# Altium PCB load_cell_amp.PcbDoc
Units mil, origin at the board's own origin, x right, y up, seen from the top; angles counter-clockwise.
Board outline 6000 x 4000 mil, 2 copper layers (Top Layer, Bottom Layer); 13 components, 9 nets, 42 pads, 4 vias.
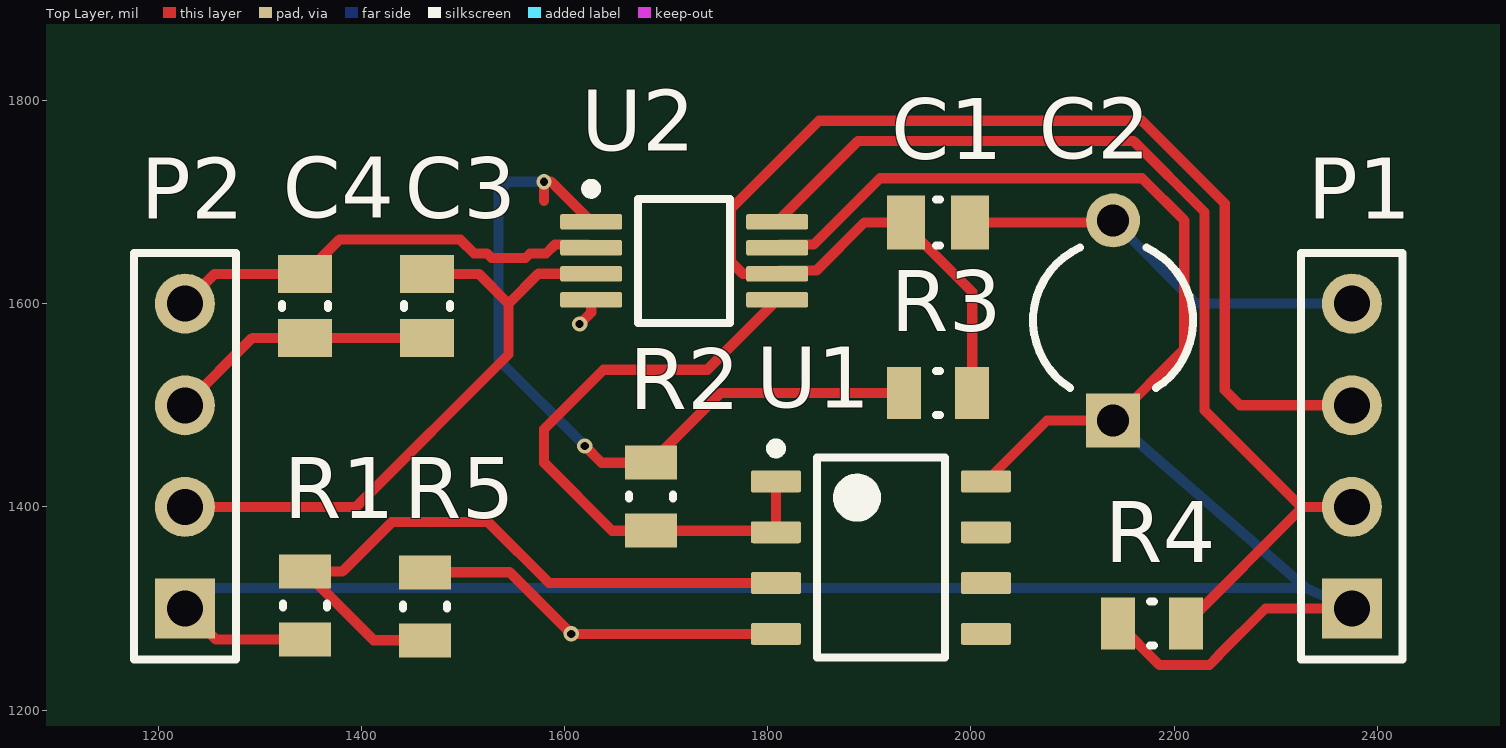
[diagram p0: Top Layer view]
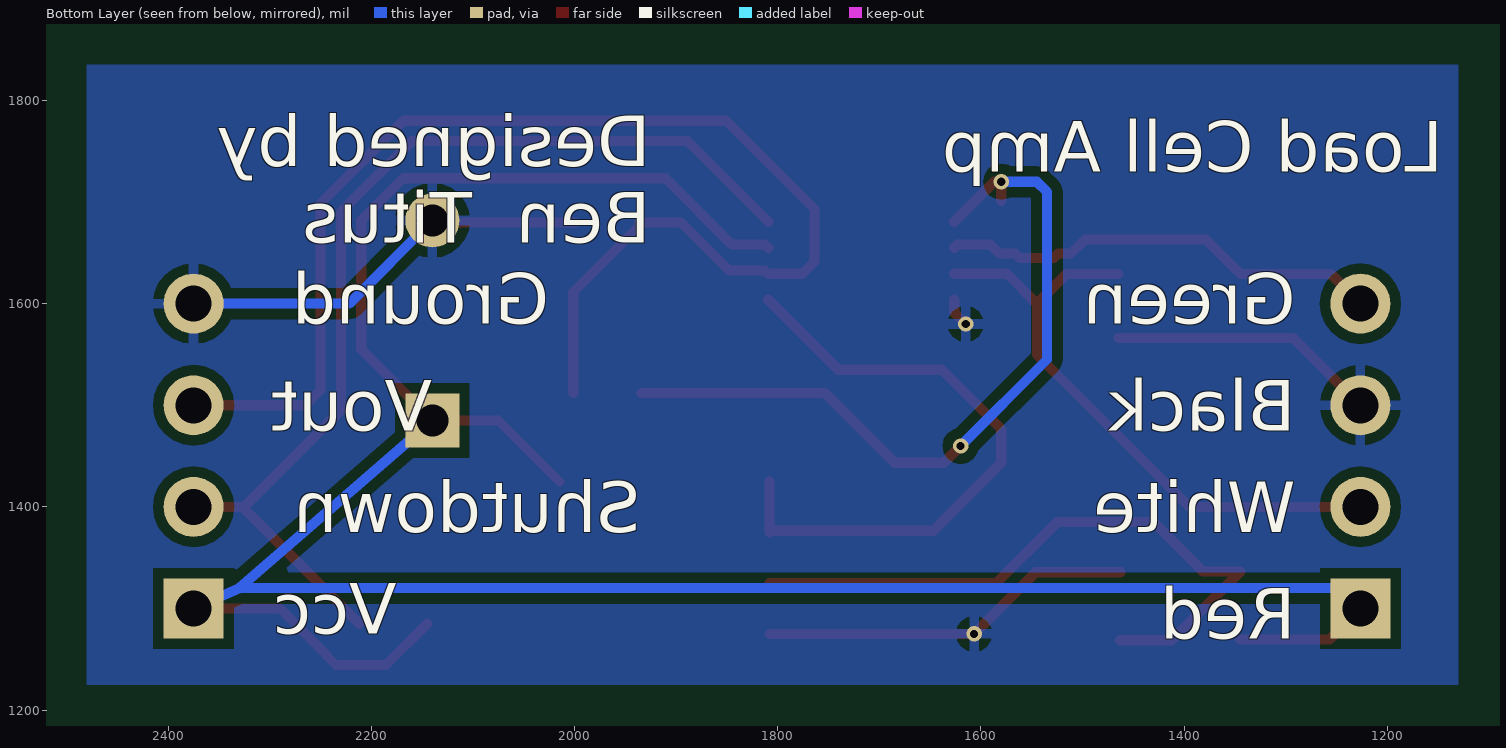
[diagram p1: Bottom Layer view, seen from below]

## Layer stack, top to bottom
Top Solder: solder mask 0.4, Solder Resist, Dk 3.5
Top Layer: signal copper 1.4
Dielectric 1: dielectric 12.6, FR-4, Dk 4.8
Bottom Layer: signal copper 1.4
Bottom Solder: solder mask 0.4, Solder Resist, Dk 3.5

## Board outline
1000,1000 7000,1000 7000,5000 1000,5000

## Design rules (kind name [scope] priority, off if disabled: settings)
Clearance [All] p1: gap=10 ignorepadtopadclearanceinfootprint=FALSE except(0: Arc-Hole Track-Hole SMDPad-Hole THPad-Hole Via-Hole Fill-Hole Poly-Hole Region-Hole Text-Hole)
PolygonConnect [All] p1: connectstyle=Relief reliefconductorwidth=10 reliefentries=4 polygonreliefangle="90 Angle" airgapwidth=10
RoomDefinition load_cell_amp [InComponentClass('load_cell_amp')] p1: confinementstyle=ConfineIn formatcopy=TRUE lockcomponents=FALSE outline 1130,1230 2485,1230 2485,1835 1130,1835
RoutingVias [All] p1: holewidth=28 width=50 viastyle="Through Hole" minholewidth=8 minwidth=15 maxholewidth=28 maxwidth=50
SolderMaskExpansion [All] p1: expansion=4
Width [All] p1: maxlimit=10 minlimit=10 preferedwidth=10
30 further rules are at their usual default settings.

## Components (designator, comment, footprint, x,y, rotation, side; value= is the part's Value field where it differs from the comment)
C1 "10nF" CAPC0805(2012)145_L 1967.87,1680 r180 top
C2 "1uF" CAPR5-4X5 2140,1583.48 r90 top
C3 "10nF" CAPC0805(2012)145_L 1464.84,1597.83 r90 top
C4 "10nF" CAPC0805(2012)145_L 1344.84,1597.83 r90 top
P1 "Header 4" HDR1X4 2375,1300 r90 top
P2 "Load Cell" HDR1X4 1226.54,1300 r90 top
R1 "5.0k" RESC0805(2012)_L 1344.84,1302.76 r270 top
R2 "1k" RESC0805(2012)_L 1685,1410 r90 top
R3 "200k" RESC0805(2012)_L 1967.87,1512.2 r0 top
R4 "10k" RESC0805(2012)_L 2178.46,1285 r0 top
R5 "3.9k" RESC0805(2012)_L 1462.87,1302.17 r270 top
U1 "LM358DR" D0008A_L 1911.54,1350 r0 top
U2 "INA332AIDGKR" DGK0008A_M 1717.87,1642.2 r0 top

## Footprints (in the part's own frame and the unit in brackets; to place one, negate y for a bottom-side part, rotate by r counter-clockwise, add the part's x,y. Pads: shape width x height; smd on the part's side, far side on the other; paste and mask are expansions set on the pad)
CAPC0805(2012)145_L [mm]
  rect 0.95x1.35 smd: 1(-0.8,0) 2(0.8,0)
  silkscreen extent -0.05,-0.58 0.05,0.58, body extent -1.1,-0.72 1.1,0.72, height 1.45
CAPR5-4X5 [mm] "Capacitor; 2 Leads"
  rect 1.35x1.35 hole 0.8: 1(-2.5,0)
  round 1.35 hole 0.8: 2(2.5,0)
  silkscreen extent -1.69,-2 1.82,2
D0008A_L [mm] "SOIC, 8-Leads, Body 5x4mm, Pitch 1.27mm, IPC High Density"
  rrect18% 1.25x0.55 smd: 1(-2.625,1.905) 2(-2.625,0.635) 3(-2.625,-0.635) 4(-2.625,-1.905) 5(2.625,-1.905) 6(2.625,-0.635) 7(2.625,0.635) 8(2.625,1.905)
  silkscreen extent -2.75,-2.5 1.6,2.85, body extent -3,-2.45 3,2.45, height 1.63
DGK0008A_M [mm] "TSOP, 8-Leads, Body 3.1x3.1mm, Pitch 0.65mm, IPC Low Density"
  rrect22% 1.55x0.381 smd: 1(-2.325,0.975) 2(-2.325,0.325) 3(-2.325,-0.325) 4(-2.325,-0.975) 5(2.325,-0.975) 6(2.325,-0.325) 7(2.325,0.325) 8(2.325,0.975)
  silkscreen extent -2.45,-1.55 1.15,1.92, body extent -2.45,-1.5 2.45,1.5, height 0.94
HDR1X4 [mm] "Connector; Header; 4 Position"
  rect 1.5x1.5 hole 0.9: 1(0,0)
  round 1.5 hole 0.9: 2(2.54,0) 3(5.08,0) 4(7.62,0)
  silkscreen extent -1.27,-1.27 8.89,1.27
RESC0805(2012)_L [mm]
  rect 0.85x1.3 smd: 1(-0.85,0) 2(0.85,0)
  silkscreen extent -0.05,-0.55 0.05,0.55, body extent -1.1,-0.67 1.1,0.68, height 0.7

## Part data
C1 C3 C4: library part CMP-1590-00003-1, "0805 (2012 Metric) Chip Capacitor", Case-EIA=0805, Case-Metric=2012, PackageReference=CAPC0805(2012)145
C2: library part Cap2, "Capacitor", PackageDescription="Capacitor; 2 Leads", PackageReference=CAPR5-4X5, Published=23-Sep-2002, Publisher="Altium Limited"
P1: "Header, 4-Pin", LatestRevisionDate=17-Jul-2002, LatestRevisionNote="Re-released for DXP Platform.", Publisher="Altium Limited"
P2: library part "Header 4", "Header, 4-Pin", LatestRevisionDate=17-Jul-2002, LatestRevisionNote="Re-released for DXP Platform.", Publisher="Altium Limited"
R1 R2 R3 R4 R5: library part CMP-1591-00002-1, "0805 (2012 Metric) Chip Resistor", Case-EIA=0805, Case-Metric=2012, PackageReference=RESC0805(2012)
U1: library part CMP-1685-00009-1, "Dual Operational Amplifier, 3 to 32 V, 0 to 70 degC, 8-Pin SOIC (D), Green (RoHS & no Sb/Br), Tape and Reel", Code_JEDEC=MS-012, ComponentLink1Description="Manufacturer URL", ComponentLink1URL=http://www.ti.com/, ComponentLink2Description=Datasheet, ComponentLink2URL=http://www.ti.com/lit/ds/symlink/lm358.pdf, ComponentLink3Description="Package Specification", ComponentLink3URL=http://www.ti.com/lit/ml/msoi002j/msoi002j.pdf, DatasheetVersion="SLOS068T, 04/2015", PackageDescription="8-Pin Small Outline Integrated Circuit, Body 4.9 x 3.9 mm, Pitch 1.27 mm", PackageReference=D0008A, PackageVersion="4040047-3/M, 06/2011"
U2: library part CMP-0944-00077-2, "Low-Power, Single Supply, CMOS, Low Cost, Instrumentation Amplifier, -55 to 125 degC, 8-pin SOP (DGK8), Green (RoHS & no Sb/Br)", Input Bias Current (+/-)(Max)(nA)=0.01, Manufacturer="Texas Instruments", Quiescent Current (+/-)(Typ)(mA)=0.415, CMRR(Min)(dB)=60, Code_JEDEC=MO-187, ComponentLink1Description="Manufacturer URL", ComponentLink1URL=http://www.ti.com/, ComponentLink2Description=Datasheet, ComponentLink2URL=http://www.ti.com/general/docs/lit/getliterature.tsp?genericPartNumber=INA332&fileType=pdf, ComponentLink3Description="Package Specification", ComponentLink3URL=http://www.ti.com/litv/pdf/mpds028d, DatasheetVersion=SBOS216B, Eco-Plan="Green (RoHS & no Sb/Br)", Gain(V/V)="5 to 1000", Input Offset (+/-)(Max)(uV)=8000, Mounting Technology="Surface Mount", Noise at 1kHz(Typ)(nV/rt(Hz))=46, Non-Linearity (+/-)(Max)(%)=0.01, Number of Channels=1, PackageDescription="8-Pin Thin Small Outline, Body 3 x 3 mm, Pitch 0.65 mm", PackageReference=DGK0008A, PackageVersion="4073329/E, 05/2006", PartNumber=INA332AIDGKR, SubFamily="Single Supply", Vs(Max)(V)=5.5, Vs(Min)(V)=2.5

## Via types
v1: diameter 15, hole 8, Top Layer to Bottom Layer, 4 vias

## Nets (pads, with @x,y where several pads share a name; then routed paths per layer and width w, separated by ;. In a path a pad name is that pad's centre, name@x,y a point inside that pad or via, vN(x,y) a via of type N, cw(c..) or ccw(c..) an arc to the next point about the centre after c; other vN are vias at no path point)
GND: C1.1 C2.2 C3.1 C4.1 P1.4 P2.3 R5.1 U1.4 U2.4 | length 1075.1
  Top Layer w10: P2.3 1292.87,1566.34 C4.1 C3.1 ; R5.1 1546.09,1335.63 v1(1606.72,1275) U1.4 ; v1(1615,1580) 1626.34,1591.34 U2.4 ; C1.1 2138.09,1680 C2.2
  Bottom Layer w10: C2.2 2221.91,1600 P1.4
NetC1_2: C1.2 P1.3 R3.2 U2.6 | length 1315.7
  Top Layer w10: R3.2 2001.34,1611.54 1936.38,1676.5 C1.2 1895.36,1680 1847.86,1632.5 1812.5,1632.5 U2.6 1775.64,1629.41 1763.9,1641.15 1763.9,1693.34 1850.56,1780 2168.53,1780 2250,1698.53 2250,1515 2265,1500 P1.3
NetC3_2: C3.2 P2.2 U2.3 | length 616.4
  Top Layer w10: P2.2 1395,1400 1545,1550 1545,1600 ; C3.2 1515.67,1629.33 1545,1600 ; U2.3 1574.41,1629.41 1545,1600
NetC4_2: C4.2 P2.4 U2.2 | length 440.1
  Top Layer w10: P2.4 1255.87,1629.33 C4.2 1378.54,1663.03 1497.63,1663.03 1511.33,1649.33 1523.95,1649.33 1528.28,1645 1561.72,1645 1566.13,1649.41 1581.9,1649.41 1590.58,1658.09 1623.25,1658.09 U2.2
NetP1_2: P1.2 R4.2 U2.8 | length 1024.6
  Top Layer w10: U2.8 1888.82,1760 2160.24,1760 2230,1690.24 2230,1495 2325,1400 2326.93,1400 ; R4.2 2326.93,1400 ; P1.2 2326.93,1400
NetR1_1: R1.1 R5.2 U1.3 | length 654.4
  Top Layer w10: R5.2 1412.36,1268.7 R1.1 1381.22,1336.22 1430,1385 1525,1385 1585,1325 U1.3
NetR2_1: R2.1 U1.1 U1.2 U2.5 | length 621.8
  Top Layer w10: U1.1 U1.2 1806.65,1376.54 R2.1 1646.9,1376.54 1580,1443.43 1580,1476.57 1638.43,1535 1740.59,1535 U2.5
NetR2_2: R2.2 R3.1 U2.1 | length 765.6
  Top Layer w10: 1580,1701.18 v1(1580,1720) 1586.93,1720 U2.1 ; v1(1620,1460) 1636.54,1443.46 R2.2 1753.74,1512.2 R3.1
  Bottom Layer w10: v1(1580,1720) 1545,1720 1535,1710 1535,1545 v1(1620,1460)
VCC: C2.1 P1.1 P2.1 R1.2 R4.1 U1.8 U2.7 | length 2622.6
  Top Layer w10: P2.1 1257.24,1269.29 R1.2 ; U2.7 1812.5,1658.09 1845.17,1658.09 1910.56,1723.48 2168.48,1723.48 2210,1681.96 2210,1555.06 C2.1 2074.94,1485.06 U1.8 ; R4.1 2185.59,1244.41 2234.87,1244.41 2243.66,1253.2 2243.66,1253.66 2290,1300 P1.1
  Bottom Layer w10: P2.1@1231.54,1320 2330.05,1320 ; C2.1 2330.05,1320 ; P1.1 2330.05,1320
pads on no net: U1.5 U1.6 U1.7

## Polygon pours and split planes (outlines as drawn)
GND on Bottom Layer "GND_L02_P000" (solid, pour order 0): 1130,1225 2480,1225 2480,1835 1130,1835

## Silkscreen, mask and mechanical layers (free items; w line width, h text height)
Bottom Overlay:
  text "Load Cell Amp" at 1145,1730 h50
  text "Designed by / Ben  Titus" at 1925,1660 h50
  text "Green" at 1290,1580 h50
  text "Ground" at 2025,1580 h50
  text "Black" at 1290,1475 h50
  text "Vout" at 2140,1475 h50
  text "White" at 1290,1375 h50
  text "Shutdown" at 1935,1375 h50
  text "Vcc" at 2175,1275 h50
  text "Red" at 1290,1270 h50
Drill Drawing:
  lines w10: 1130,1225 2480,1225 2480,1835 1130,1835 1130,1225